# Altium PCB uTCA_MCH_PCB1_template.PcbDoc (part 2 of 2)
Units mm, origin at the board's own origin, x right, y up, seen from the top; angles counter-clockwise.
Board outline 182.75 x 75.8 mm, 2 copper layers (Top Layer, Bottom Layer); 3 components, 0 nets, 1517 pads, 0 vias.
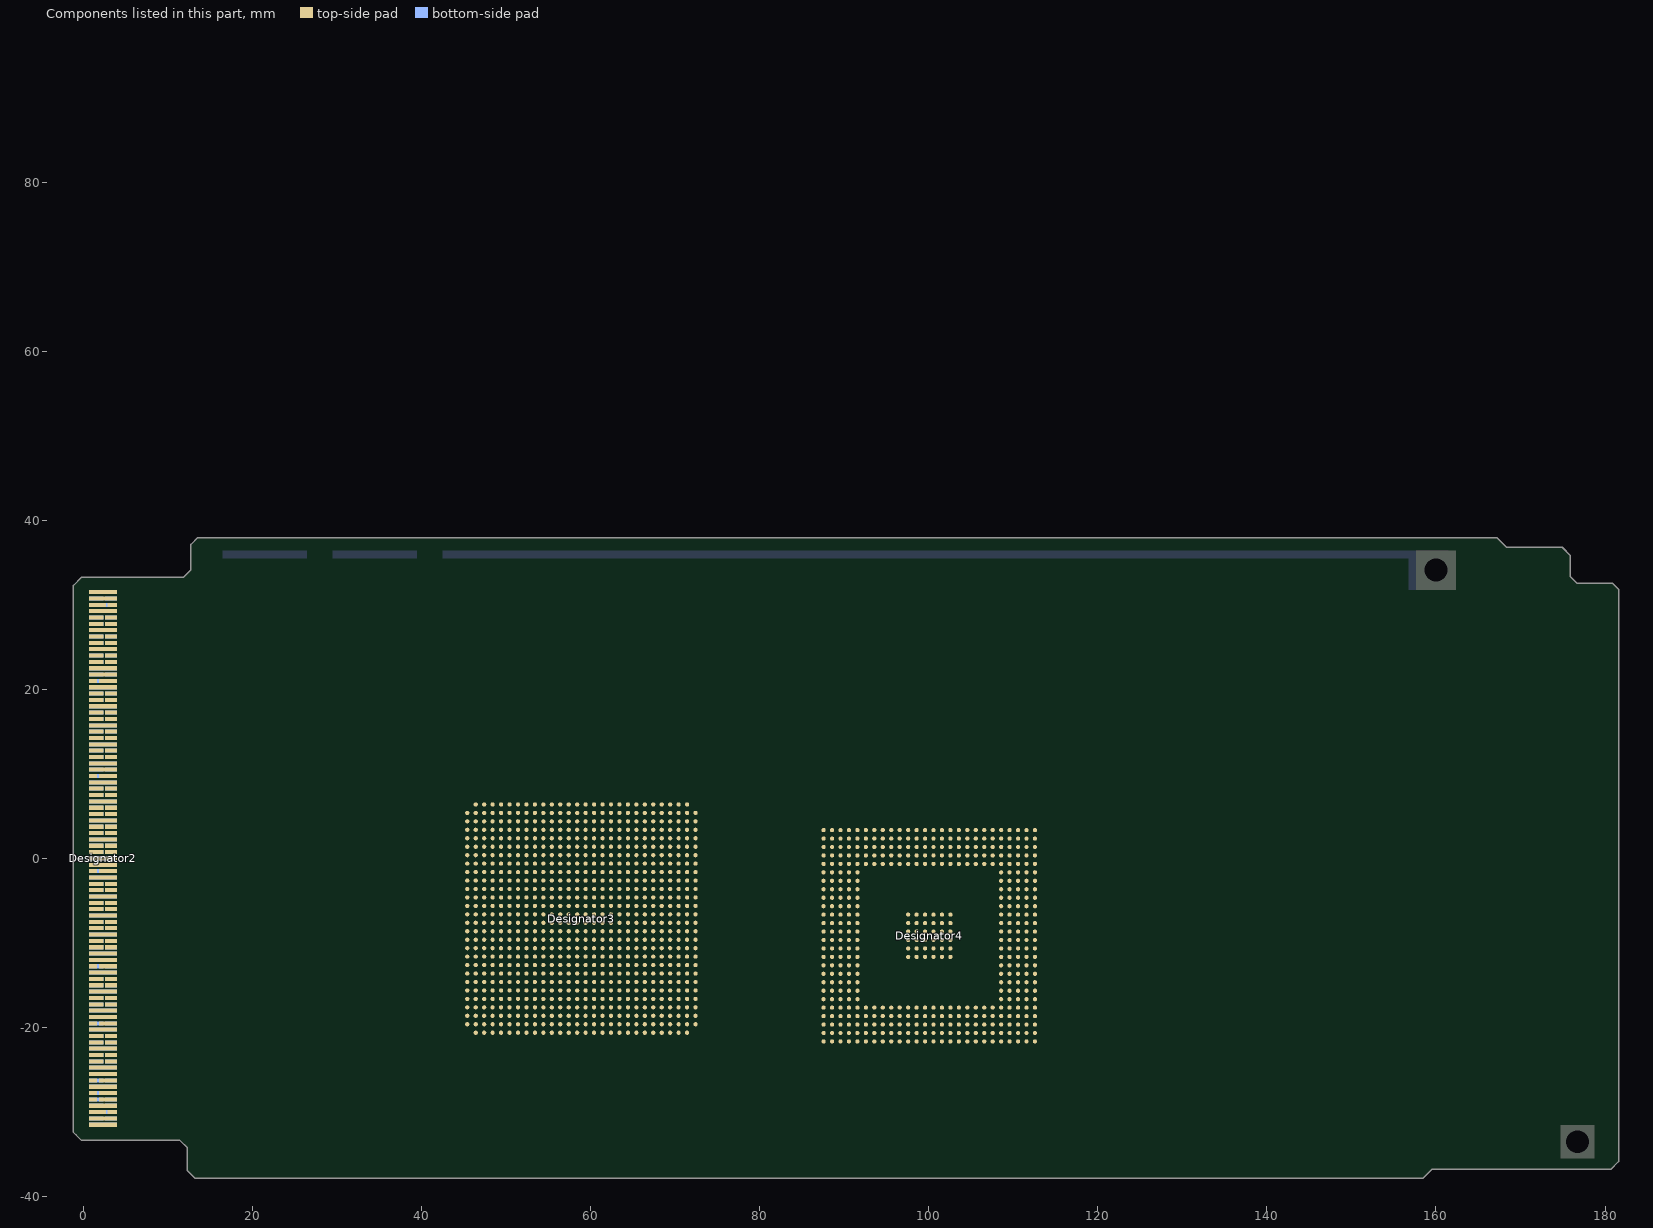
[diagram p2: the components of this part, seen from the top]

## Nets (pads, with @x,y where several pads share a name; then routed paths per layer and width w, separated by ;. In a path a pad name is that pad's centre, name@x,y a point inside that pad or via, vN(x,y) a via of type N, cw(c..) or ccw(c..) an arc to the next point about the centre after c; other vN are vias at no path point)
pads on no net: Designator2.1 Designator2.2 Designator2.2mate Designator2.3 Designator2.3mate Designator2.4 Designator2.5 Designator2.6 Designator2.7 Designator2.8 Designator2.9 Designator2.10 Designator2.11 Designator2.12 Designator2.13 Designator2.14 Designator2.15 Designator2.16 Designator2.17 Designator2.18 Designator2.19 Designator2.20 Designator2.21 Designator2.22 Designator2.23 Designator2.24 Designator2.25 Designator2.26 Designator2.27 Designator2.28 Designator2.29 Designator2.30 Designator2.31 Designator2.32 Designator2.33 Designator2.34 Designator2.35 Designator2.36 Designator2.37 Designator2.38 Designator2.39 Designator2.40 Designator2.41 Designator2.42 Designator2.43 Designator2.44 Designator2.45 Designator2.46 Designator2.47 Designator2.48 Designator2.49 Designator2.50 Designator2.51 Designator2.52 Designator2.53 Designator2.54 Designator2.55 Designator2.56 Designator2.57 Designator2.58 Designator2.59 Designator2.60 Designator2.61 Designator2.62 Designator2.63 Designator2.64 Designator2.65 Designator2.66 Designator2.67 Designator2.68 Designator2.69 Designator2.70 Designator2.71 Designator2.72 Designator2.73 Designator2.74 Designator2.75 Designator2.76 Designator2.77 Designator2.78 Designator2.79 Designator2.80 Designator2.81 Designator2.82 Designator2.83 Designator2.84 Designator2.85 Designator2.86 Designator2.87 Designator2.88 Designator2.89 Designator2.90 Designator2.91 Designator2.92 Designator2.93 Designator2.94 Designator2.95 Designator2.96 Designator2.97 Designator2.98 Designator2.99 Designator2.100 Designator2.101 Designator2.102 Designator2.103 Designator2.104 Designator2.105 Designator2.106 Designator2.107 Designator2.108 Designator2.109 Designator2.110 Designator2.111 Designator2.112 Designator2.113 Designator2.114 Designator2.115 Designator2.116 Designator2.117 Designator2.118 Designator2.119 Designator2.120 Designator2.121 Designator2.122 Designator2.123 Designator2.124 Designator2.125 Designator2.126 Designator2.127 Designator2.128 Designator2.129 Designator2.130 Designator2.131 Designator2.132 Designator2.133 Designator2.134 Designator2.135 Designator2.136 Designator2.137 Designator2.138 Designator2.139 Designator2.140 Designator2.141 Designator2.142 Designator2.143 Designator2.144 Designator2.145 Designator2.146 Designator2.147 Designator2.148 Designator2.149 Designator2.150 Designator2.151 Designator2.152 Designator2.153 Designator2.154 Designator2.155 Designator2.156 Designator2.157 Designator2.158 Designator2.159 Designator2.160 Designator2.161 Designator2.162 Designator2.163 Designator2.164 Designator2.165 Designator2.166 Designator2.167 Designator2.168 Designator2.169 Designator2.170 Designator2.lmate Designator3.A2 Designator3.A3 Designator3.A4 Designator3.A5 Designator3.A6 Designator3.A7 Designator3.A8 Designator3.A9 Designator3.A10 Designator3.A11 Designator3.A12 Designator3.A13 Designator3.A14 Designator3.A15 Designator3.A16 Designator3.A17 Designator3.A18 Designator3.A19 Designator3.A20 Designator3.A21 Designator3.A22 Designator3.A23 Designator3.A24 Designator3.A25 Designator3.A26 Designator3.A27 Designator3.AA1 Designator3.AA2 Designator3.AA3 Designator3.AA4 Designator3.AA5 Designator3.AA6 Designator3.AA7 Designator3.AA8 Designator3.AA9 Designator3.AA10 Designator3.AA11 Designator3.AA12 Designator3.AA13 Designator3.AA14 Designator3.AA15 Designator3.AA16 Designator3.AA17 Designator3.AA18 Designator3.AA19 Designator3.AA20 Designator3.AA21 Designator3.AA22 Designator3.AA23 Designator3.AA24 Designator3.AA25 Designator3.AA26 Designator3.AA27 Designator3.AA28 Designator3.AB1 Designator3.AB2 Designator3.AB3 Designator3.AB4 Designator3.AB5 Designator3.AB6 Designator3.AB7 Designator3.AB8 Designator3.AB9 Designator3.AB10 Designator3.AB11 Designator3.AB12 Designator3.AB13 Designator3.AB14 Designator3.AB15 Designator3.AB16 Designator3.AB17 Designator3.AB18 Designator3.AB19 Designator3.AB20 Designator3.AB21 Designator3.AB22 Designator3.AB23 Designator3.AB24 Designator3.AB25 Designator3.AB26 Designator3.AB27 Designator3.AB28 Designator3.AC1 Designator3.AC2 Designator3.AC3 Designator3.AC4 Designator3.AC5 Designator3.AC6 Designator3.AC7 Designator3.AC8 Designator3.AC9 Designator3.AC10 Designator3.AC11 Designator3.AC12 Designator3.AC13 Designator3.AC14 Designator3.AC15 Designator3.AC16 Designator3.AC17 Designator3.AC18 Designator3.AC19 Designator3.AC20 Designator3.AC21 Designator3.AC22 Designator3.AC23 Designator3.AC24 Designator3.AC25 Designator3.AC26 Designator3.AC27 Designator3.AC28 Designator3.AD1 Designator3.AD2 Designator3.AD3 Designator3.AD4 Designator3.AD5 Designator3.AD6 Designator3.AD7 Designator3.AD8 Designator3.AD9 Designator3.AD10 Designator3.AD11 Designator3.AD12 Designator3.AD13 Designator3.AD14 Designator3.AD15 Designator3.AD16 Designator3.AD17 Designator3.AD18 Designator3.AD19 Designator3.AD20 Designator3.AD21 Designator3.AD22 Designator3.AD23 Designator3.AD24 Designator3.AD25 Designator3.AD26 Designator3.AD27 Designator3.AD28 Designator3.AE1 Designator3.AE2 Designator3.AE3 Designator3.AE4 Designator3.AE5 Designator3.AE6 Designator3.AE7 Designator3.AE8 Designator3.AE9 Designator3.AE10 Designator3.AE11 Designator3.AE12 Designator3.AE13 Designator3.AE14 Designator3.AE15 Designator3.AE16 Designator3.AE17 Designator3.AE18 Designator3.AE19 Designator3.AE20 Designator3.AE21 Designator3.AE22 Designator3.AE23 Designator3.AE24 Designator3.AE25 Designator3.AE26 Designator3.AE27 Designator3.AE28 Designator3.AF1 Designator3.AF2 Designator3.AF3 Designator3.AF4 Designator3.AF5 Designator3.AF6 Designator3.AF7 Designator3.AF8 Designator3.AF9 Designator3.AF10 Designator3.AF11 Designator3.AF12 Designator3.AF13 Designator3.AF14 Designator3.AF15 Designator3.AF16 Designator3.AF17 Designator3.AF18 Designator3.AF19 Designator3.AF20 Designator3.AF21 Designator3.AF22 Designator3.AF23 Designator3.AF24 Designator3.AF25 Designator3.AF26 Designator3.AF27 Designator3.AF28 Designator3.AG1 Designator3.AG2 Designator3.AG3 Designator3.AG4 Designator3.AG5 Designator3.AG6 Designator3.AG7 Designator3.AG8 Designator3.AG9 Designator3.AG10 Designator3.AG11 Designator3.AG12 Designator3.AG13 Designator3.AG14 Designator3.AG15 Designator3.AG16 Designator3.AG17 Designator3.AG18 Designator3.AG19 Designator3.AG20 Designator3.AG21 Designator3.AG22 Designator3.AG23 Designator3.AG24 Designator3.AG25 Designator3.AG26 Designator3.AG27 Designator3.AG28 Designator3.AH2 Designator3.AH3 Designator3.AH4 Designator3.AH5 Designator3.AH6 Designator3.AH7 Designator3.AH8 Designator3.AH9 Designator3.AH10 Designator3.AH11 Designator3.AH12 Designator3.AH13 Designator3.AH14 Designator3.AH15 Designator3.AH16 Designator3.AH17 Designator3.AH18 Designator3.AH19 Designator3.AH20 Designator3.AH21 Designator3.AH22 Designator3.AH23 Designator3.AH24 Designator3.AH25 Designator3.AH26 Designator3.AH27 Designator3.B1 Designator3.B2 Designator3.B3 Designator3.B4 Designator3.B5 Designator3.B6 Designator3.B7 Designator3.B8 Designator3.B9 Designator3.B10 Designator3.B11 Designator3.B12 Designator3.B13 Designator3.B14 Designator3.B15 Designator3.B16 Designator3.B17 Designator3.B18 Designator3.B19 Designator3.B20 Designator3.B21 Designator3.B22 Designator3.B23 Designator3.B24 Designator3.B25 Designator3.B26 Designator3.B27 Designator3.B28 Designator3.C1 Designator3.C2 Designator3.C3 Designator3.C4 Designator3.C5 Designator3.C6 Designator3.C7 Designator3.C8 Designator3.C9 Designator3.C10 Designator3.C11 Designator3.C12 Designator3.C13 Designator3.C14 Designator3.C15 Designator3.C16 Designator3.C17 Designator3.C18 Designator3.C19 Designator3.C20 Designator3.C21 Designator3.C22 Designator3.C23 Designator3.C24 Designator3.C25 Designator3.C26 Designator3.C27 Designator3.C28 Designator3.D1 Designator3.D2 Designator3.D3 Designator3.D4 Designator3.D5 Designator3.D6 Designator3.D7 Designator3.D8 Designator3.D9 Designator3.D10 Designator3.D11 Designator3.D12 Designator3.D13 Designator3.D14 Designator3.D15 Designator3.D16 Designator3.D17 Designator3.D18 Designator3.D19 Designator3.D20 Designator3.D21 Designator3.D22 Designator3.D23 Designator3.D24 Designator3.D25 Designator3.D26 Designator3.D27 Designator3.D28 Designator3.E1 Designator3.E2 Designator3.E3 Designator3.E4 Designator3.E5 Designator3.E6 Designator3.E7 Designator3.E8 Designator3.E9 Designator3.E10 Designator3.E11 Designator3.E12 Designator3.E13 Designator3.E14 Designator3.E15 Designator3.E16 Designator3.E17 Designator3.E18 Designator3.E19 Designator3.E20 Designator3.E21 Designator3.E22 Designator3.E23 Designator3.E24 Designator3.E25 Designator3.E26 Designator3.E27 Designator3.E28 Designator3.F1 Designator3.F2 Designator3.F3 Designator3.F4 Designator3.F5 Designator3.F6 Designator3.F7 Designator3.F8 Designator3.F9 Designator3.F10 Designator3.F11 Designator3.F12 Designator3.F13 Designator3.F14 Designator3.F15 Designator3.F16 Designator3.F17 Designator3.F18 Designator3.F19 Designator3.F20 Designator3.F21 Designator3.F22 Designator3.F23 Designator3.F24 Designator3.F25 Designator3.F26 Designator3.F27 Designator3.F28 Designator3.G1 Designator3.G2 Designator3.G3 Designator3.G4 Designator3.G5 Designator3.G6 Designator3.G7 Designator3.G8 Designator3.G9 Designator3.G10 Designator3.G11 Designator3.G12 Designator3.G13 Designator3.G14 Designator3.G15 Designator3.G16 Designator3.G17 Designator3.G18 Designator3.G19 Designator3.G20 Designator3.G21 Designator3.G22 Designator3.G23 Designator3.G24 Designator3.G25 Designator3.G26 Designator3.G27 Designator3.G28 Designator3.H1 Designator3.H2 Designator3.H3 Designator3.H4 Designator3.H5 Designator3.H6 Designator3.H7 Designator3.H8 Designator3.H9 Designator3.H10 Designator3.H11 Designator3.H12 Designator3.H13 Designator3.H14 Designator3.H15 Designator3.H16 Designator3.H17 Designator3.H18 Designator3.H19 Designator3.H20 Designator3.H21 Designator3.H22 Designator3.H23 Designator3.H24 Designator3.H25 Designator3.H26 Designator3.H27 Designator3.H28 Designator3.J1 Designator3.J2 Designator3.J3 Designator3.J4 Designator3.J5 Designator3.J6 Designator3.J7 Designator3.J8 Designator3.J9 Designator3.J10 Designator3.J11 Designator3.J12 Designator3.J13 Designator3.J14 Designator3.J15 Designator3.J16 Designator3.J17 Designator3.J18 Designator3.J19 Designator3.J20 Designator3.J21 Designator3.J22 Designator3.J23 Designator3.J24 Designator3.J25 Designator3.J26 Designator3.J27 Designator3.J28 Designator3.K1 Designator3.K2 Designator3.K3 Designator3.K4 Designator3.K5 Designator3.K6 Designator3.K7 Designator3.K8 Designator3.K9 Designator3.K10 Designator3.K11 Designator3.K12 Designator3.K13 Designator3.K14 Designator3.K15 Designator3.K16 Designator3.K17 Designator3.K18 Designator3.K19 Designator3.K20 Designator3.K21 Designator3.K22 Designator3.K23 Designator3.K24 Designator3.K25 Designator3.K26 Designator3.K27 Designator3.K28 Designator3.L1 Designator3.L2 Designator3.L3 Designator3.L4 Designator3.L5 Designator3.L6 Designator3.L7 Designator3.L8 Designator3.L9 Designator3.L10 Designator3.L11 Designator3.L12 Designator3.L13 Designator3.L14 Designator3.L15 Designator3.L16 Designator3.L17 Designator3.L18 Designator3.L19 Designator3.L20 Designator3.L21 Designator3.L22 Designator3.L23 Designator3.L24 Designator3.L25 Designator3.L26 Designator3.L27 Designator3.L28 Designator3.M1 Designator3.M2 Designator3.M3 Designator3.M4 Designator3.M5 Designator3.M6 Designator3.M7 Designator3.M8 Designator3.M9 Designator3.M10 Designator3.M11 Designator3.M12 Designator3.M13 Designator3.M14 Designator3.M15 Designator3.M16 Designator3.M17 Designator3.M18 Designator3.M19 Designator3.M20 Designator3.M21 Designator3.M22 Designator3.M23 Designator3.M24 Designator3.M25 Designator3.M26 Designator3.M27 Designator3.M28 Designator3.N1 Designator3.N2 Designator3.N3 Designator3.N4 Designator3.N5 Designator3.N6 Designator3.N7 Designator3.N8 Designator3.N9 Designator3.N10 Designator3.N11 Designator3.N12 Designator3.N13 Designator3.N14 Designator3.N15 Designator3.N16 Designator3.N17 Designator3.N18 Designator3.N19 Designator3.N20 Designator3.N21 Designator3.N22 Designator3.N23 Designator3.N24 Designator3.N25 Designator3.N26 Designator3.N27 Designator3.N28 Designator3.P1 Designator3.P2 Designator3.P3 Designator3.P4 Designator3.P5 Designator3.P6 Designator3.P7 Designator3.P8 Designator3.P9 Designator3.P10 Designator3.P11 Designator3.P12 Designator3.P13 Designator3.P14 Designator3.P15 Designator3.P16 Designator3.P17 Designator3.P18 Designator3.P19 Designator3.P20 Designator3.P21 Designator3.P22 Designator3.P23 Designator3.P24 Designator3.P25 Designator3.P26 Designator3.P27 Designator3.P28 Designator3.R1 Designator3.R2 Designator3.R3 Designator3.R4 Designator3.R5 Designator3.R6 Designator3.R7 Designator3.R8 Designator3.R9 Designator3.R10 Designator3.R11 Designator3.R12 Designator3.R13 Designator3.R14 Designator3.R15 Designator3.R16 Designator3.R17 Designator3.R18 Designator3.R19 Designator3.R20 Designator3.R21 Designator3.R22 Designator3.R23 Designator3.R24 Designator3.R25 Designator3.R26 Designator3.R27 Designator3.R28 Designator3.T1 Designator3.T2 Designator3.T3 Designator3.T4 Designator3.T5 Designator3.T6 Designator3.T7 Designator3.T8 Designator3.T9 Designator3.T10 Designator3.T11 Designator3.T12 Designator3.T13 Designator3.T14 Designator3.T15 Designator3.T16 Designator3.T17 Designator3.T18 Designator3.T19 Designator3.T20 Designator3.T21 Designator3.T22 Designator3.T23 Designator3.T24 Designator3.T25 Designator3.T26 Designator3.T27 Designator3.T28 Designator3.U1 Designator3.U2 Designator3.U3 Designator3.U4 Designator3.U5 Designator3.U6 Designator3.U7 Designator3.U8 Designator3.U9 Designator3.U10 Designator3.U11 Designator3.U12 Designator3.U13 Designator3.U14 Designator3.U15 Designator3.U16 Designator3.U17 Designator3.U18 Designator3.U19 Designator3.U20 Designator3.U21 Designator3.U22 Designator3.U23 Designator3.U24 Designator3.U25 Designator3.U26 Designator3.U27 Designator3.U28 Designator3.V1 Designator3.V2 Designator3.V3 Designator3.V4 Designator3.V5 Designator3.V6 Designator3.V7 Designator3.V8 Designator3.V9 Designator3.V10 Designator3.V11 Designator3.V12 Designator3.V13 Designator3.V14 Designator3.V15 Designator3.V16 Designator3.V17 Designator3.V18 Designator3.V19 Designator3.V20 Designator3.V21 Designator3.V22 Designator3.V23 Designator3.V24 Designator3.V25 Designator3.V26 Designator3.V27 Designator3.V28 Designator3.W1 Designator3.W2 Designator3.W3 Designator3.W4 Designator3.W5 Designator3.W6 Designator3.W7 Designator3.W8 Designator3.W9 Designator3.W10 Designator3.W11 Designator3.W12 Designator3.W13 Designator3.W14 Designator3.W15 Designator3.W16 Designator3.W17 Designator3.W18 Designator3.W19 Designator3.W20 Designator3.W21 Designator3.W22 Designator3.W23 Designator3.W24 Designator3.W25 Designator3.W26 Designator3.W27 Designator3.W28 Designator3.Y1 Designator3.Y2 Designator3.Y3 Designator3.Y4 Designator3.Y5 Designator3.Y6 Designator3.Y7 Designator3.Y8 Designator3.Y9 Designator3.Y10 Designator3.Y11 Designator3.Y12 Designator3.Y13 Designator3.Y14 Designator3.Y15 Designator3.Y16 Designator3.Y17 Designator3.Y18 Designator3.Y19 Designator3.Y20 Designator3.Y21 Designator3.Y22 Designator3.Y23 Designator3.Y24 Designator3.Y25 Designator3.Y26 Designator3.Y27 Designator3.Y28 Designator4.A1 Designator4.A2 Designator4.A3 Designator4.A4 Designator4.A5 Designator4.A6 Designator4.A7 Designator4.A8 Designator4.A9 Designator4.A10 Designator4.A11 Designator4.A12 Designator4.A13 Designator4.A14 Designator4.A15 Designator4.A16 Designator4.A17 Designator4.A18 Designator4.A19 Designator4.A20 Designator4.A21 Designator4.A22 Designator4.A23 Designator4.A24 Designator4.A25 Designator4.A26 Designator4.AA1 Designator4.AA2 Designator4.AA3 Designator4.AA4 Designator4.AA5 Designator4.AA22 Designator4.AA23 Designator4.AA24 Designator4.AA25 Designator4.AA26 Designator4.AB1 Designator4.AB2 Designator4.AB3 Designator4.AB4 Designator4.AB5 Designator4.AB6 Designator4.AB7 Designator4.AB8 Designator4.AB9 Designator4.AB10 Designator4.AB11 Designator4.AB12 Designator4.AB13 Designator4.AB14 Designator4.AB15 Designator4.AB16 Designator4.AB17 Designator4.AB18 Designator4.AB19 Designator4.AB20 Designator4.AB21 Designator4.AB22 Designator4.AB23 Designator4.AB24 Designator4.AB25 Designator4.AB26 Designator4.AC1 Designator4.AC2 Designator4.AC3 Designator4.AC4 Designator4.AC5 Designator4.AC6 Designator4.AC7 Designator4.AC8 Designator4.AC9 Designator4.AC10 Designator4.AC11 Designator4.AC12 Designator4.AC13 Designator4.AC14 Designator4.AC15 Designator4.AC16 Designator4.AC17 Designator4.AC18 Designator4.AC19 Designator4.AC20 Designator4.AC21 Designator4.AC22 Designator4.AC23 Designator4.AC24 Designator4.AC25 Designator4.AC26 Designator4.AD1 Designator4.AD2 Designator4.AD3 Designator4.AD4 Designator4.AD5 Designator4.AD6 Designator4.AD7 Designator4.AD8 Designator4.AD9 Designator4.AD10 Designator4.AD11 Designator4.AD12 Designator4.AD13 Designator4.AD14 Designator4.AD15 Designator4.AD16 Designator4.AD17 Designator4.AD18 Designator4.AD19 Designator4.AD20 Designator4.AD21 Designator4.AD22 Designator4.AD23 Designator4.AD24 Designator4.AD25 Designator4.AD26 Designator4.AE1 Designator4.AE2 Designator4.AE3 Designator4.AE4 Designator4.AE5 Designator4.AE6 Designator4.AE7 Designator4.AE8 Designator4.AE9 Designator4.AE10 Designator4.AE11 Designator4.AE12 Designator4.AE13 Designator4.AE14 Designator4.AE15 Designator4.AE16 Designator4.AE17 Designator4.AE18 Designator4.AE19 Designator4.AE20 Designator4.AE21 Designator4.AE22 Designator4.AE23 Designator4.AE24 Designator4.AE25 Designator4.AE26 Designator4.AF1 Designator4.AF2 Designator4.AF3 Designator4.AF4 Designator4.AF5 Designator4.AF6 Designator4.AF7 Designator4.AF8 Designator4.AF9 Designator4.AF10 Designator4.AF11 Designator4.AF12 Designator4.AF13 Designator4.AF14 Designator4.AF15 Designator4.AF16 Designator4.AF17 Designator4.AF18 Designator4.AF19 Designator4.AF20 Designator4.AF21 Designator4.AF22 Designator4.AF23 Designator4.AF24 Designator4.AF25 Designator4.AF26 Designator4.B1 Designator4.B2 Designator4.B3 Designator4.B4 Designator4.B5 Designator4.B6 Designator4.B7 Designator4.B8 Designator4.B9 Designator4.B10 Designator4.B11 Designator4.B12 Designator4.B13 Designator4.B14 Designator4.B15 Designator4.B16 Designator4.B17 Designator4.B18 Designator4.B19 Designator4.B20 Designator4.B21 Designator4.B22 Designator4.B23 Designator4.B24 Designator4.B25 Designator4.B26 Designator4.C1 Designator4.C2 Designator4.C3 Designator4.C4 Designator4.C5 Designator4.C6 Designator4.C7 Designator4.C8 Designator4.C9 Designator4.C10 Designator4.C11 Designator4.C12 Designator4.C13 Designator4.C14 Designator4.C15 Designator4.C16 Designator4.C17 Designator4.C18 Designator4.C19 Designator4.C20 Designator4.C21 Designator4.C22 Designator4.C23 Designator4.C24 Designator4.C25 Designator4.C26 Designator4.D1 Designator4.D2 Designator4.D3 Designator4.D4 Designator4.D5 Designator4.D6 Designator4.D7 Designator4.D8 Designator4.D9 Designator4.D10 Designator4.D11 Designator4.D12 Designator4.D13 Designator4.D14 Designator4.D15 Designator4.D16 Designator4.D17 Designator4.D18 Designator4.D19 Designator4.D20 Designator4.D21 Designator4.D22 Designator4.D23 Designator4.D24 Designator4.D25 Designator4.D26 Designator4.E1 Designator4.E2 Designator4.E3 Designator4.E4 Designator4.E5 Designator4.E6 Designator4.E7 Designator4.E8 Designator4.E9 Designator4.E10 Designator4.E11 Designator4.E12 Designator4.E13 Designator4.E14 Designator4.E15 Designator4.E16 Designator4.E17 Designator4.E18 Designator4.E19 Designator4.E20 Designator4.E21 Designator4.E22 Designator4.E23 Designator4.E24 Designator4.E25 Designator4.E26 Designator4.F1 Designator4.F2 Designator4.F3 Designator4.F4 Designator4.F5 Designator4.F22 Designator4.F23 Designator4.F24 Designator4.F25 Designator4.F26 Designator4.G1 Designator4.G2 Designator4.G3 Designator4.G4 Designator4.G5 Designator4.G22 Designator4.G23 Designator4.G24 Designator4.G25 Designator4.G26 Designator4.H1 Designator4.H2 Designator4.H3 Designator4.H4 Designator4.H5 Designator4.H22 Designator4.H23 Designator4.H24 Designator4.H25 Designator4.H26 Designator4.J1 Designator4.J2 Designator4.J3 Designator4.J4 Designator4.J5 Designator4.J22 Designator4.J23 Designator4.J24 Designator4.J25 Designator4.J26 Designator4.K1 Designator4.K2 Designator4.K3 Designator4.K4 Designator4.K5 Designator4.K22 Designator4.K23 Designator4.K24 Designator4.K25 Designator4.K26 Designator4.L1 Designator4.L2 Designator4.L3 Designator4.L4 Designator4.L5 Designator4.L11 Designator4.L12 Designator4.L13 Designator4.L14 Designator4.L15 Designator4.L16 Designator4.L22 Designator4.L23 Designator4.L24 Designator4.L25 Designator4.L26 Designator4.M1 Designator4.M2 Designator4.M3 Designator4.M4 Designator4.M5 Designator4.M11 Designator4.M12 Designator4.M13 Designator4.M14 Designator4.M15 Designator4.M16 Designator4.M22 Designator4.M23 Designator4.M24 Designator4.M25 Designator4.M26 Designator4.N1 Designator4.N2 Designator4.N3 Designator4.N4 Designator4.N5 Designator4.N11 Designator4.N12 Designator4.N13 Designator4.N14 Designator4.N15 Designator4.N16 Designator4.N22 Designator4.N23 Designator4.N24 Designator4.N25 Designator4.N26 Designator4.P1 Designator4.P2 Designator4.P3 Designator4.P4 Designator4.P5 Designator4.P11 Designator4.P12 Designator4.P13 Designator4.P14 Designator4.P15 Designator4.P16 Designator4.P22 Designator4.P23 Designator4.P24 Designator4.P25 Designator4.P26 Designator4.R1 Designator4.R2 Designator4.R3 Designator4.R4 Designator4.R5 Designator4.R11 Designator4.R12 Designator4.R13 Designator4.R14 Designator4.R15 Designator4.R16 Designator4.R22 Designator4.R23 Designator4.R24 Designator4.R25 Designator4.R26 Designator4.T1 Designator4.T2 Designator4.T3 Designator4.T4 Designator4.T5 Designator4.T11 Designator4.T12 Designator4.T13 Designator4.T14 Designator4.T15 Designator4.T16 Designator4.T22 Designator4.T23 Designator4.T24 Designator4.T25 Designator4.T26 Designator4.U1 Designator4.U2 Designator4.U3 Designator4.U4 Designator4.U5 Designator4.U22 Designator4.U23 Designator4.U24 Designator4.U25 Designator4.U26 Designator4.V1 Designator4.V2 Designator4.V3 Designator4.V4 Designator4.V5 Designator4.V22 Designator4.V23 Designator4.V24 Designator4.V25 Designator4.V26 Designator4.W1 Designator4.W2 Designator4.W3 Designator4.W4 Designator4.W5 Designator4.W22 Designator4.W23 Designator4.W24 Designator4.W25 Designator4.W26 Designator4.Y1 Designator4.Y2 Designator4.Y3 Designator4.Y4 Designator4.Y5 Designator4.Y22 Designator4.Y23 Designator4.Y24 Designator4.Y25 Designator4.Y26

## Other copper
Top Layer:
  region: 146.8,-35.05 146.8,-36.75 158,-36.75 158,-35.15 166.25,-35.15 166.25,-35.65 180.6,-35.65 180.6,-31.25 153.5,-31.25 153.5,-35.05
  region: 162.35,31.75 174.6,31.75 174.6,35.75 167,35.75 167,36.45 162.35,36.45
Bottom Layer:
  region: 146.8,-35.05 146.8,-36.75 158,-36.75 158,-35.15 166.25,-35.15 166.25,-35.65 180.6,-35.65 180.6,-31.25 153.5,-31.25 153.5,-35.05
  region: 162.35,31.75 174.6,31.75 174.6,35.75 167,35.75 167,36.45 162.35,36.45

## Silkscreen, mask and mechanical layers (free items; w line width, h text height)
Mechanical 1:
  lines w0.01: 9.271,-32.5 12.45,-32.5 cw(c12.45,-33.5) 13.45,-33.5 13.45,-36.3 ; 9.55,32.5 12.434,32.5 ; 12.4,32.5 ccw(c12.425,33.525) 13.45,33.5 13.45,36.25 cw(c13.95,36.25) 13.95,36.75 167,36.75 167,35.85 167,35.75 174.6,35.75 174.6,31.55 180.6,31.55 180.6,-35.65 166.25,-35.65 166.25,-35.15 158,-35.15 158,-36.75 13.9,-36.75 ; 13.45,-36.25 ccw(c13.95,-36.25) 13.95,-36.75
Mechanical 15:
  lines w0.01: 146.8,-35.05 146.8,-29.3 153.45,-29.3 153.5,-29.3 153.5,-35.05 146.8,-35.05
  text "Edge connector markings" at 9.95,-32.1 h0.7